# Altium PCB Gastroscopy-CutController.PcbDoc (part 1 of 3)
Units mm, origin at the board's own origin, x right, y up, seen from the top; angles counter-clockwise.
Board outline 69.5 x 69.5 mm, 4 copper layers (Top Layer, Layer 4 (GND), Layer 5 (PWR), Bottom Layer), stack 1.49 mm thick; 92 components, 63 nets, 304 pads, 96 vias.
Unrouted connection lines stored in the file: 142.
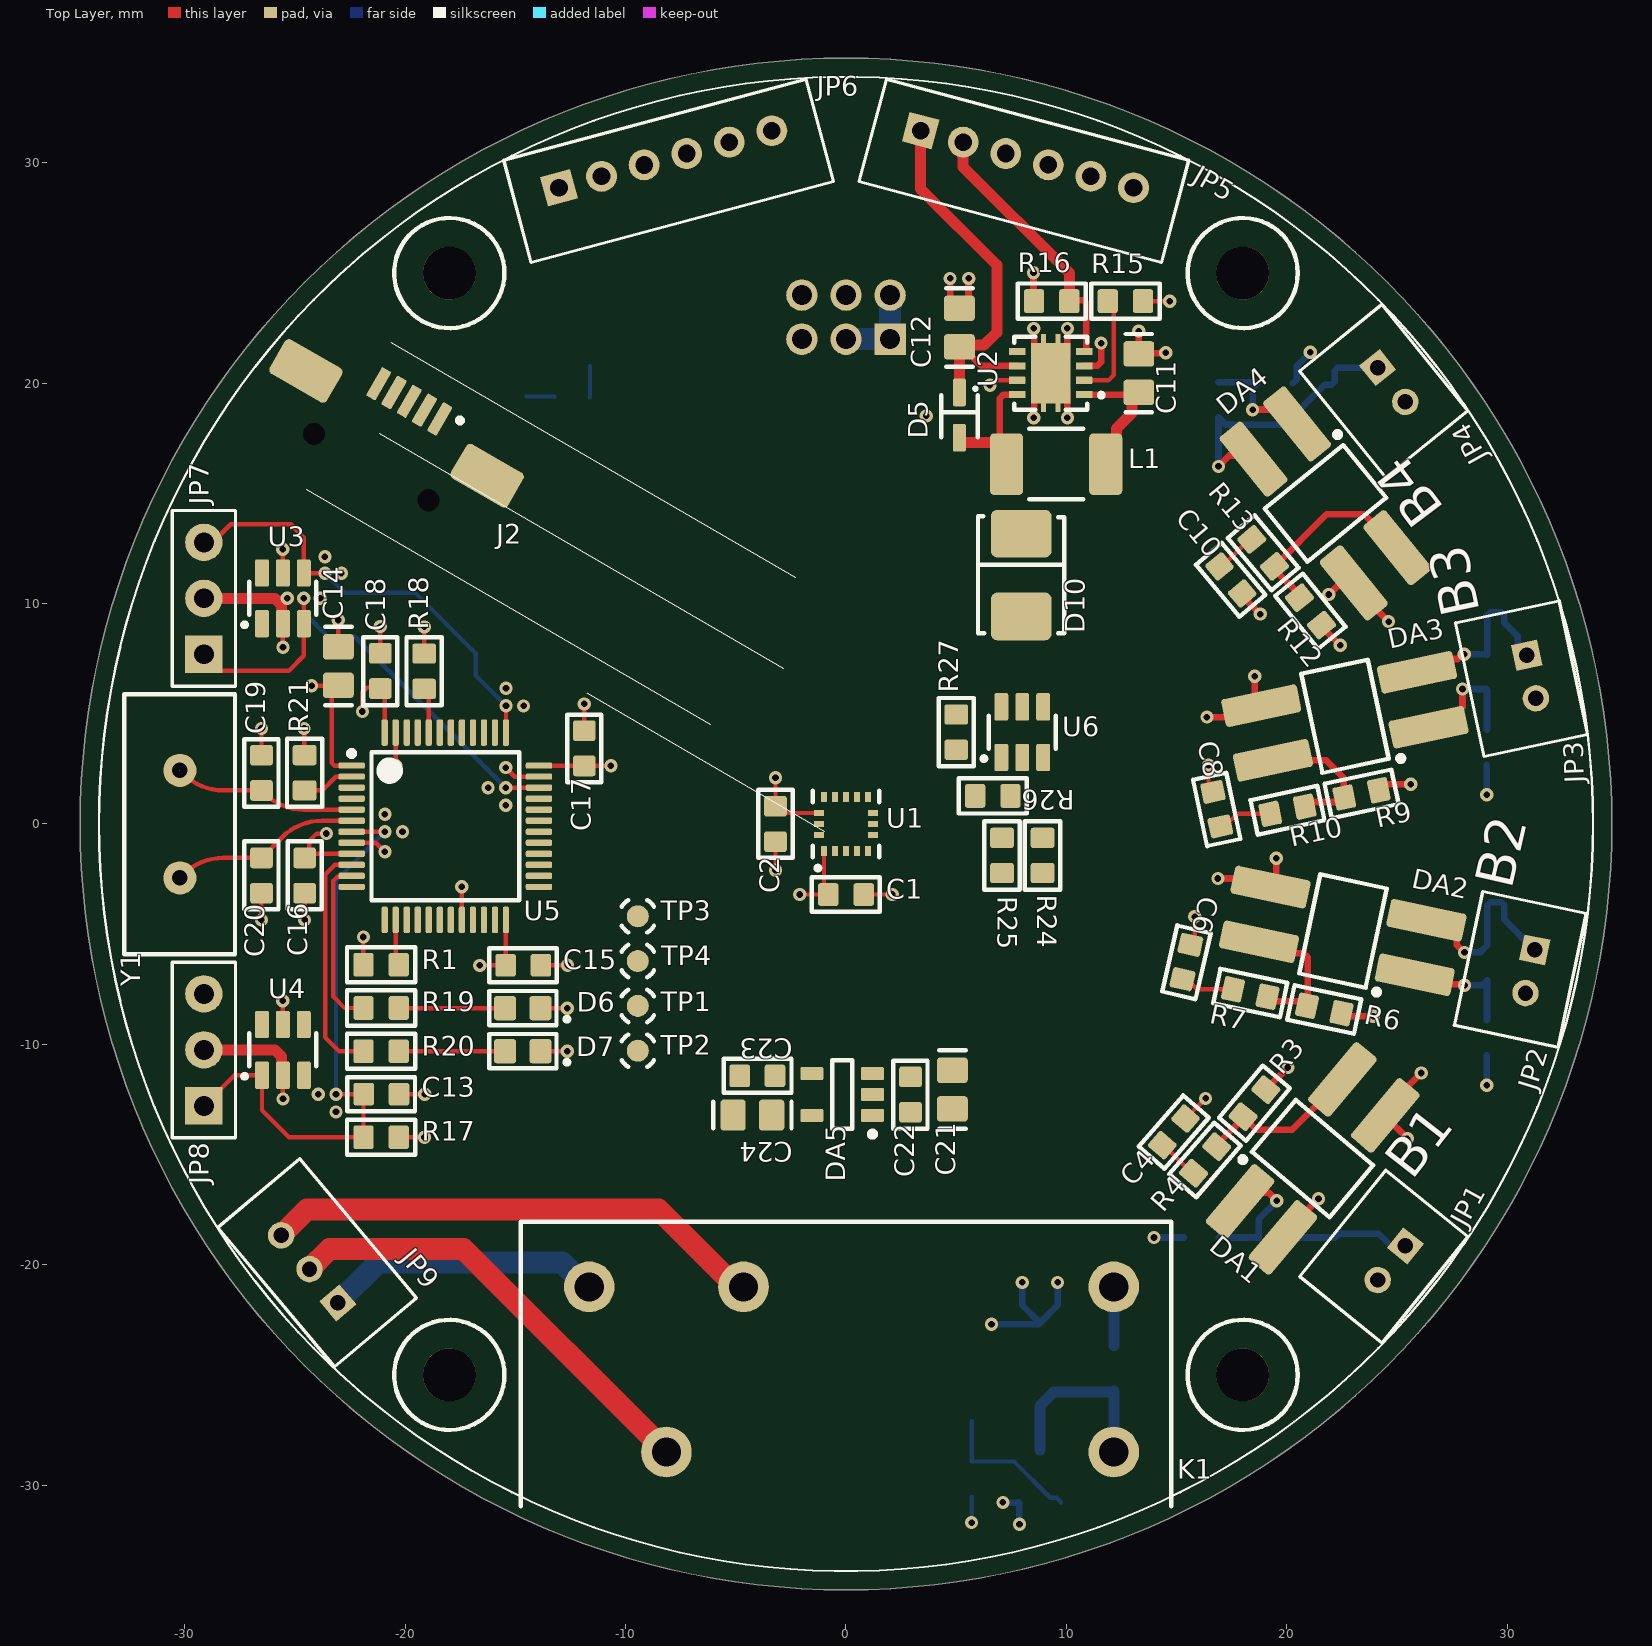
[diagram p0: Top Layer view]
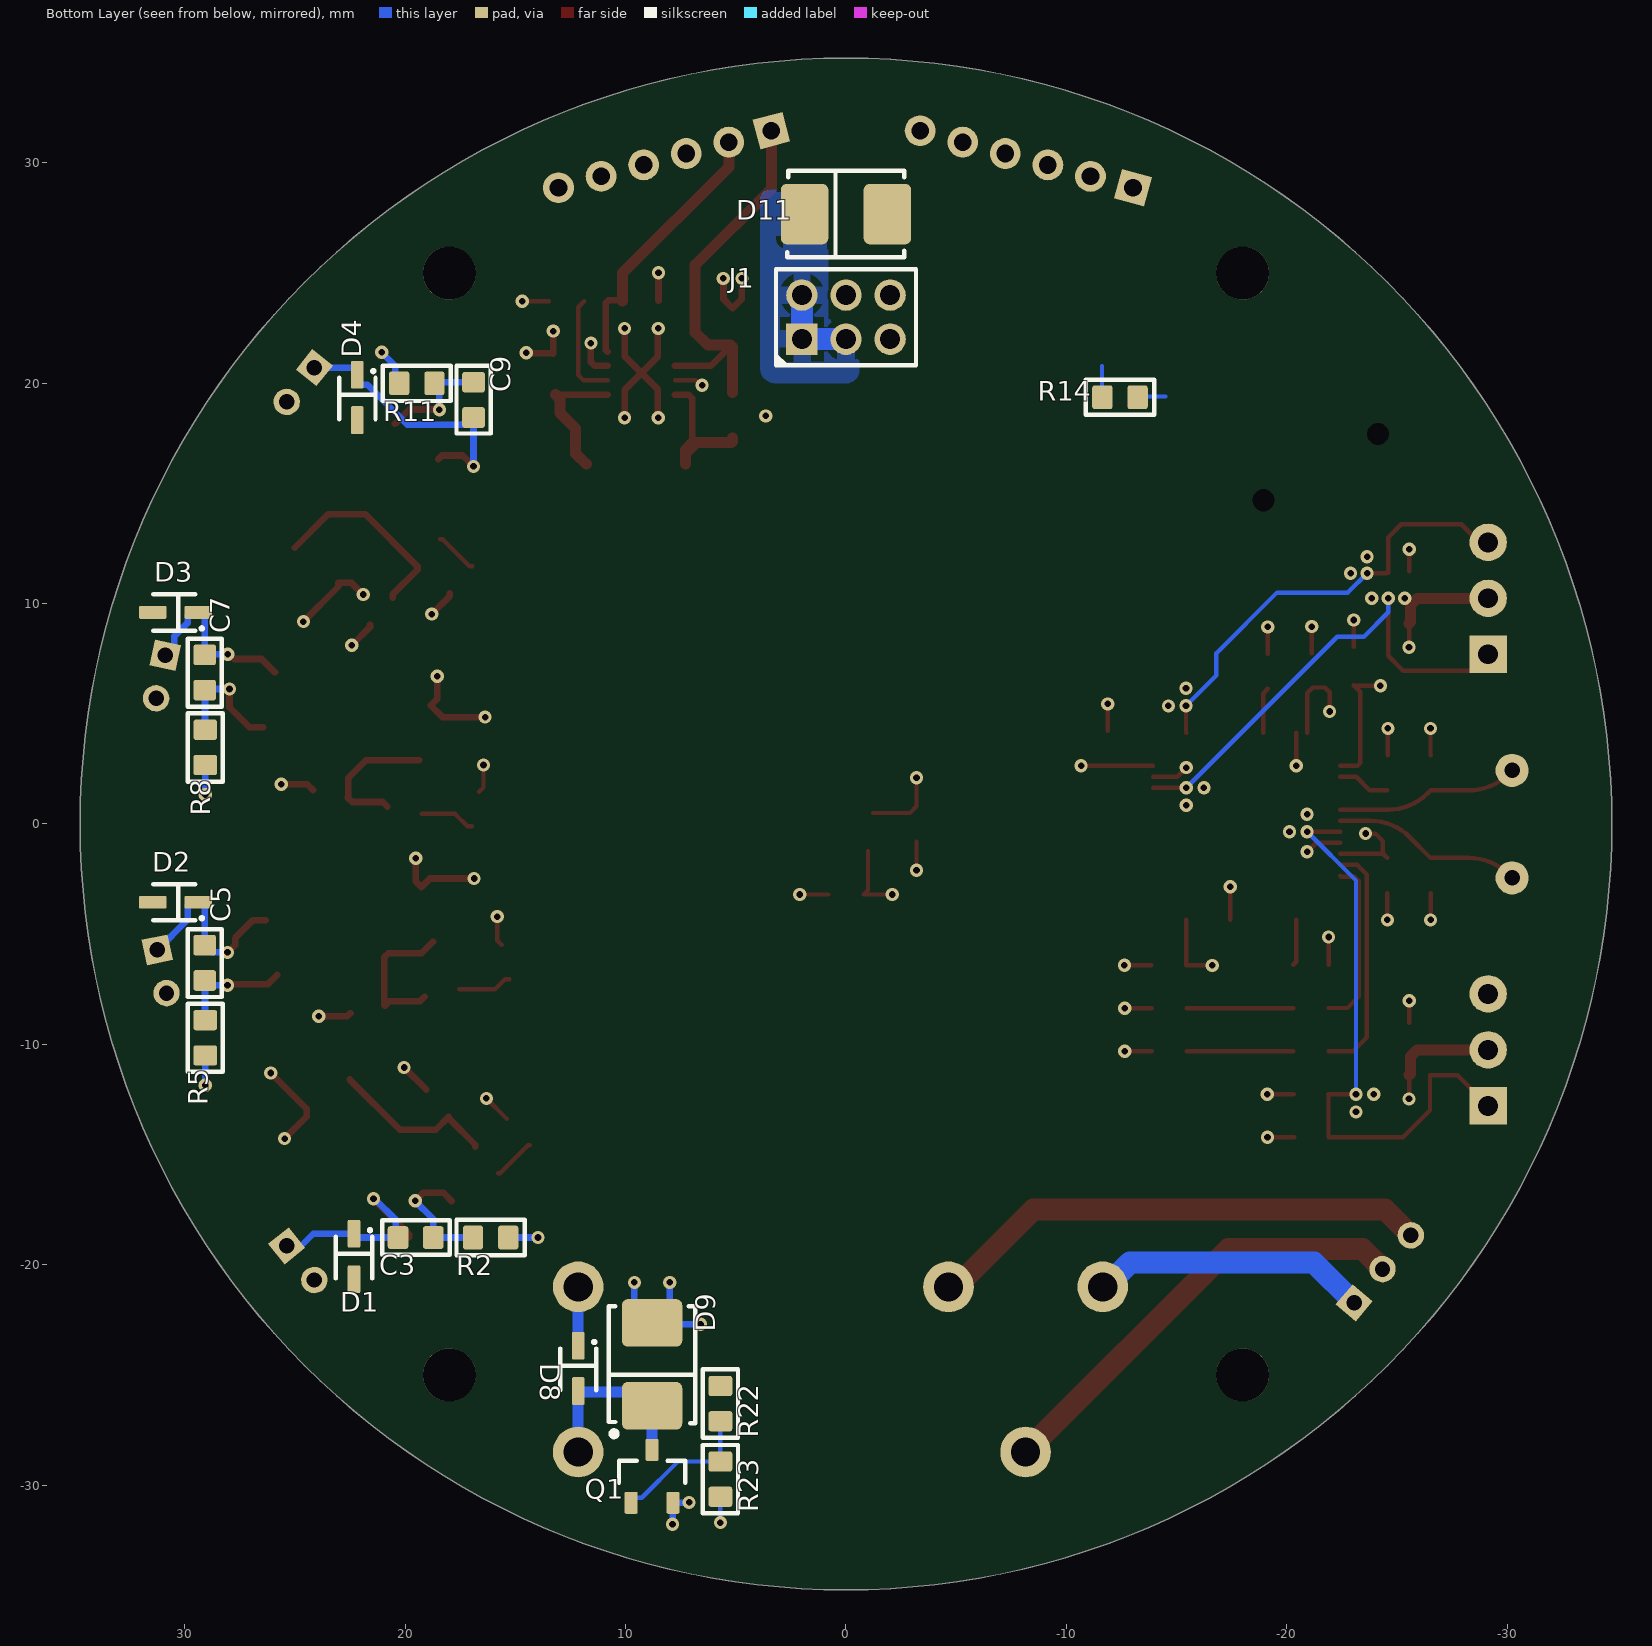
[diagram p1: Bottom Layer view, seen from below]

## Layer stack, top to bottom
Top Solder: solder mask 0.0127, Dk 4
Top Layer: signal copper 0.018
Prepreg 1: prepreg 0.127, Dk 4.2
Layer 4 (GND): signal copper 0.018
Core 2: core 1.164, Dk 4.2
Layer 5 (PWR): signal copper 0.018
Prepreg 4: prepreg 0.127, Dk 4.2
Bottom Layer: signal copper 0.018
Bottom Solder: solder mask 0.0127, Dk 4

## Board outline
0,-34.75 cw(c0,0) -34.75,0 cw(c0,0) 0,34.75 cw(c0,0) 34.75,0 cw(c0,0)

## Design rules (kind name [scope] priority, off if disabled: settings)
BoardOutlineClearance [All] p1: gap=0.508 ignorepadtopadclearanceinfootprint=FALSE
Clearance Clearance_CHASSIS [InNet('CHASSIS')] p1: gap=0.508 ignorepadtopadclearanceinfootprint=FALSE // ETH chassis to other
Clearance Clearance_TP [HasFootprint('TEST_POINT_TH')] p2: gap=0.508 ignorepadtopadclearanceinfootprint=FALSE // Test point for programming
Clearance Clearance_ETH_VDDA [InNamedPolygon('ETH_VDDA') vs InNamedPolygon('SOLID_3V3_LAYER5')] p3: gap=0.127 ignorepadtopadclearanceinfootprint=FALSE except(0.508: Fill-Fill Fill-Poly Fill-Region Poly-Poly Poly-Region Region-Region) // ETH_VDDA clearance to 3V3 polygon
Clearance Clearance_VCC_PLANE [InNamedPolygon('SOLID_3V3_LAYER5')] p4: gap=0.178 ignorepadtopadclearanceinfootprint=FALSE // Clearance between 3V3 VCC plane and vias
Clearance Clearance_Signal_Via [IsLinkedToPadViaTemplate('signal_via')] p5: gap=0.127 ignorepadtopadclearanceinfootprint=FALSE except(0.178: Via-Fill Via-Poly Via-Region) // 50 Ohm via, clearance to GND plane and to other polygons
Clearance Clearance_3W [OnLayer('Layer 3 (SIG)')] p6: gap=0.127 ignorepadtopadclearanceinfootprint=FALSE except(0.254: Arc-Arc Arc-Track Arc-SMDPad Arc-THPad Arc-Via Arc-Fill Arc-Poly Arc-Region Arc-Text Arc-Hole Track-Track Track-SMDPad Track-THPad Track-Via Track-Fill Track-Poly Track-Region Track-Text Track-Hole) // 3W rule for high-speed nets; applicable for 5mil tracks
Clearance [All] p7: gap=0.127 ignorepadtopadclearanceinfootprint=FALSE except(0.26: Arc-Hole Track-Hole SMDPad-Hole THPad-Hole Via-Hole Fill-Hole Poly-Hole Region-Hole Text-Hole) // Track-Track 7 mil for MCU
ComponentClearance ComponentClearance_TERMINALS [HasFootprint('DG128-5.0-03P-14') or HasFootprint('DG128-5.0-02P-14')] p1: gap=0 collisioncheckmode=3 verticalgap=0 showdistances=FALSE
ComponentClearance [All] p2: gap=0.508 collisioncheckmode=3 verticalgap=1.016 showdistances=FALSE donotcheckwithout3dbody=TRUE
DiffPairsRouting DiffPairsRouting_RS485 [InDifferentialPairClass('RS485_DIFFPAIR')] p1: maxlimit=0.305 minlimit=0.305 mostfreqgap=0.305 toplayer_minwidth=0.178 toplayer_maxwidth=0.178 toplayer_prefwidth=0.178 midlayer3_minwidth=0.178 midlayer3_maxwidth=0.178 midlayer3_prefwidth=0.178 midlayer4_minwidth=0.178 midlayer4_maxwidth=0.178 midlayer4_prefwidth=0.178 bottomlayer_minwidth=0.178 bottomlayer_maxwidth=0.178 bottomlayer_prefwidth=0.178 maxuncoupledlength=12.7 // 120 Ohm differential impedance
DiffPairsRouting DiffPairsRouting_USB [InDifferentialPairClass('USB_DIFFPAIR')] p2: maxlimit=0.127 minlimit=0.1 mostfreqgap=0.127 toplayer_mingap=0.127 toplayer_minwidth=0.19 toplayer_maxwidth=0.19 toplayer_prefwidth=0.19 bottomlayer_mingap=0.127 bottomlayer_minwidth=0.19 bottomlayer_maxwidth=0.19 bottomlayer_prefwidth=0.19 impedanceprofiledriven=TRUE impedanceprofileid={13F299FD-EDF9-4D52-ACC5-885CEE12CEAA} impedanceprofilevalue=90.000000 maxuncoupledlength=1.016 // 90 Ohm differential impedance
DiffPairsRouting DiffPairsRouting_MDI [InDifferentialPairClass('MDI_DIFFPAIR')] p3: maxlimit=0.127 minlimit=0.127 mostfreqgap=0.127 toplayer_minwidth=0.203 toplayer_maxwidth=0.203 toplayer_prefwidth=0.203 midlayer3_minwidth=0.203 midlayer3_maxwidth=0.203 midlayer3_prefwidth=0.203 midlayer4_minwidth=0.203 midlayer4_maxwidth=0.203 midlayer4_prefwidth=0.203 bottomlayer_minwidth=0.203 bottomlayer_maxwidth=0.203 bottomlayer_prefwidth=0.203 maxuncoupledlength=1.016 // 100 Ohm differential impedance
HoleSize [All] p1: absolutevalues=TRUE maxlimit=6.35 minlimit=0.254 maxpercent=80.000 minpercent=20.000
HoleToHoleClearance [All] p1: gap=0.381 allowstackedmicrovias=TRUE
MatchedLengths MatchLengths_xSignals_LCD [InxSignalClass('xSignals_LCD')] p1: tolerance=1.016 checknetsindiffpair=FALSE checkdiffpairvsdiffpair=TRUE checkxsignals=TRUE checkothers=TRUE usedelayunits=TRUE delaytolerance=100.000000 targetsourcename=LCD_CLK-LCD_CLK_MCU_PP1
MatchedLengths MatchLengths_xSignals_ETH [InxSignalClass('xSignals_ETH')] p2: tolerance=1.016 checknetsindiffpair=FALSE checkdiffpairvsdiffpair=TRUE checkxsignals=TRUE checkothers=TRUE usedelayunits=TRUE delaytolerance=100.000000 targetsourcename=ETH_CLK-ETH_RMII_CLK_PP1
MatchedLengths MatchLengths_xSignals_FMC [InxSignalClass('xSignals_FMC')] p3: tolerance=1.016 checknetsindiffpair=FALSE checkdiffpairvsdiffpair=TRUE checkxsignals=TRUE checkothers=TRUE usedelayunits=TRUE delaytolerance=100.000000 targetsourcename=FMC_CLK-FMC_CLK_MCU_PP1
MatchedLengths MatchLengths_xSignals_SDC [InxSignalClass('xSignals_SDC')] p4: tolerance=1.016 checknetsindiffpair=FALSE checkdiffpairvsdiffpair=TRUE checkxsignals=TRUE checkothers=TRUE usedelayunits=TRUE delaytolerance=100.000000 targetsourcename=SDMMC1_SDCARD_CK-SDMMC1_SDCARD_CK_MCU_PP1
MatchedLengths MatchedLengths_Diff_Grouped_MDI [InDifferentialPairClass('MDI_DIFFPAIR')] p5: tolerance=1.016 checknetsindiffpair=FALSE checkdiffpairvsdiffpair=TRUE checkxsignals=TRUE checkothers=TRUE
MatchedLengths MatchedLengths_Diff_Within_MDI [InDifferentialPairClass('MDI_DIFFPAIR')] p6: tolerance=1.016 checknetsindiffpair=TRUE checkdiffpairvsdiffpair=FALSE checkxsignals=FALSE checkothers=FALSE
MatchedLengths MatchedLengths_Diff_Within_RS485 [InDifferentialPairClass('RS485_DIFFPAIR')] p7: tolerance=2.54 checknetsindiffpair=TRUE checkdiffpairvsdiffpair=FALSE checkxsignals=FALSE checkothers=FALSE
MatchedLengths MatchedLengths_Diff_Within_USB [InDifferentialPairClass('USB_DIFFPAIR')] p8: tolerance=1.016 checknetsindiffpair=TRUE checkdiffpairvsdiffpair=FALSE checkxsignals=FALSE checkothers=FALSE
MinimumAnnularRing [All] p1: minimumring=0.127
MinimumSolderMaskSliver [All] p1: minsoldermaskwidth=0.05
PlaneConnect [All] p1: planeconnectstyle=Direct reliefexpansion=0.508 reliefentries=4 reliefconductorwidth=0.254 reliefairgap=0.254
PolygonConnect PolygonConnect_SMB_TVS [HasFootprint('SMB') or HasFootprint('SMB-BIDIR')] p1: connectstyle=Relief reliefconductorwidth=2 reliefentries=4 polygonreliefangle="90 Angle" airgapwidth=0.2 // POWER IN fuse
PolygonConnect PolygonConnect_POWER_SWITCH [HasFootprint('48BFSP1M2QT')] p2: connectstyle=Relief reliefconductorwidth=1.016 reliefentries=4 polygonreliefangle="90 Angle" airgapwidth=0.127 // POWER switch
PolygonConnect PolygonConnect_POWER_FILTER [HasFootprint('BNX022-01L')] p3: connectstyle=Relief reliefconductorwidth=2.032 reliefentries=4 polygonreliefangle="90 Angle" airgapwidth=0.127 // POWER filter FL1
PolygonConnect PolygonConnect_POWER_IN_MOSFET [InComponent('Q1')] p4: connectstyle=Relief reliefconductorwidth=0.381 reliefentries=4 polygonreliefangle="90 Angle" airgapwidth=0.127 // Q1 reverse polarity protection MOSFET
PolygonConnect PolygonConnect_MOSFET_ZENER [InComponent('D2')] p5: connectstyle=Relief reliefconductorwidth=0.508 reliefentries=4 polygonreliefangle="90 Angle" airgapwidth=0.127 // Q1 MOSFET gate voltage stabilizer
PolygonConnect PolygonConnect_DCDC_IC [HasFootprint('SOIC-8EP_150MIL') vs InNet('GND')] p6: connectstyle=Relief reliefconductorwidth=2.032 reliefentries=4 polygonreliefangle="90 Angle" airgapwidth=0.127 // DC/DC IC connection
PolygonConnect PolygonConnect_DCDC_CAPS [(WithinRoom('DC/DC Step-Down Converter 12V') Or WithinRoom('DC/DC Step-Down Converter 3.3V')) And HasFootprint('CAP_1210')] p7: connectstyle=Relief reliefconductorwidth=1.27 reliefentries=4 polygonreliefangle="90 Angle" airgapwidth=0.127 // DC/DC input and output capacitors
PolygonConnect PolygonConnect_ETH_BULKCAP [WithinRoom('10/100 Mbps Ethernet PHY') And HasFootprint('CAP_1210')] p8: connectstyle=Relief reliefconductorwidth=1.27 reliefentries=4 polygonreliefangle="90 Angle" airgapwidth=0.127 // 1210 bulck capacitor in ETH power supply
PolygonConnect PolygonConnect_DCDC_IND [(InNet('12V') Or InNet('3V3')) And HasFootprint('SRU1048')] p9: connectstyle=Relief reliefconductorwidth=1.778 reliefentries=4 polygonreliefangle="90 Angle" airgapwidth=0.127 // DC/DC inductors terminal in specific nets
PolygonConnect PolygonConnect_DCDC_5V_IC [HasFootprint('SOT-23-6') vs (InNet('GND') Or InNet('12V')) And WithinRoom('USB 2.0 Full-Speed')] p10: connectstyle=Relief reliefconductorwidth=0.584 reliefentries=4 polygonreliefangle="90 Angle" airgapwidth=0.127 // DC/DC 5V IC connection
PolygonConnect PolygonConnect_DCDC_5V_CAPS [HasFootprint('CAP_1210') vs InNet('5V')] p11: connectstyle=Direct reliefconductorwidth=1.27 reliefentries=4 polygonreliefangle="90 Angle" airgapwidth=0.3 // Caps connection to GND and VCC polygons
PolygonConnect PolygonConnect_DCDC_5V_OUT_CAP [InNet('5V') And HasFootprint('CAP_0603')] p12: connectstyle=Relief reliefconductorwidth=0.813 reliefentries=4 polygonreliefangle="90 Angle" airgapwidth=0.127 // Output cap connection to VCC polygon
PolygonConnect PolygonConnect_DCDC_5V_IND [HasFootprint('SDR1006')] p13: connectstyle=Direct reliefconductorwidth=0.8 reliefentries=4 polygonreliefangle="90 Angle" airgapwidth=0.3 // DC/DC 5V inductor terminal in specific nets
PolygonConnect PolygonConnect_DCDC_HOTSWITCH [InNet('NetC4_2')] p14: connectstyle=Relief reliefconductorwidth=0.8 reliefentries=4 polygonreliefangle="90 Angle" airgapwidth=0.3 // DC/DC 5V inductor terminal in specific nets
PolygonConnect PolygonConnect_DCDC_BL_IC [WithinRoom('LCD & Capacitive Touchscreen Module') And HasFootprint('SOT-23-6')] p15: connectstyle=Relief reliefconductorwidth=0.584 reliefentries=4 polygonreliefangle="90 Angle" airgapwidth=0.127 // DC/DC Backlight IC
PolygonConnect PolygonConnect_DCDC_BL_CAPS [WithinRoom('LCD & Capacitive Touchscreen Module') And HasFootprint('CAP_0805')] p16: connectstyle=Relief reliefconductorwidth=1.016 reliefentries=4 polygonreliefangle="90 Angle" airgapwidth=0.127 // DC/DC Backlight capacitors
PolygonConnect PolygonConnect_DCDC_BL_IND [WithinRoom('LCD & Capacitive Touchscreen Module') And HasFootprint('LQH3NPN470MMEL')] p17: connectstyle=Relief reliefconductorwidth=0.965 reliefentries=4 polygonreliefangle="90 Angle" airgapwidth=0.127 // DC/DC Backlight inductor
PolygonConnect PolygonConnect_WIFI_GND [InNet('GND') And HasFootprint('ATWINC3400-MR210CA142')] p18: connectstyle=Relief reliefconductorwidth=0.762 reliefentries=4 polygonreliefangle="90 Angle" airgapwidth=0.127 // WiFi module to GND poly
PolygonConnect PolygonConnect_USB_CONN_GND [InNet('GND') vs HasFootprint('USB3106-30-0230-A')] p19: connectstyle=Relief reliefconductorwidth=0.508 reliefentries=4 polygonreliefangle="90 Angle" airgapwidth=0.203 // USB connector GND
PolygonConnect PolygonConnect_FB [HasFootprint('FB_1206')] p20: connectstyle=Relief reliefconductorwidth=1.143 reliefentries=4 polygonreliefangle="90 Angle" airgapwidth=0.127 // Ferrite Bead to poly
PolygonConnect PolygonConnect_FUSE [HasFootprint('PTC_1812')] p21: connectstyle=Relief reliefconductorwidth=1.778 reliefentries=4 polygonreliefangle="90 Angle" airgapwidth=0.127 // Fuse to poly
PolygonConnect PolygonConnect_12V_OUT_SMA [(WithinRoom('RS-485 Interface') Or WithinRoom('Wiegand Interface')) And HasFootprint('SMA')] p22: connectstyle=Relief reliefconductorwidth=1.524 reliefentries=4 polygonreliefangle="90 Angle" airgapwidth=0.127 // TVS diodes in SMA package, 12V output polygons
PolygonConnect PolygonConnect_TP_GND [InNet('GND') vs HasFootprint('TEST_POINT_TH') Or HasFootprint('TEST_POINT_SMT')] p23: connectstyle=Relief reliefconductorwidth=0.508 reliefentries=4 polygonreliefangle="90 Angle" airgapwidth=0.508 // Test points to GND
PolygonConnect PolygonConnect_ETH_CHASSIS [InNet('CHASSIS')] p24: connectstyle=Relief reliefconductorwidth=1.016 reliefentries=4 polygonreliefangle="90 Angle" airgapwidth=0.381 // ETH Chassis
PolygonConnect PolygonConnect_VIA [IsVia] p25: connectstyle=Direct reliefconductorwidth=0.8 reliefentries=4 polygonreliefangle="90 Angle" airgapwidth=0.3
PolygonConnect [All] p26: connectstyle=Relief reliefconductorwidth=0.8 reliefentries=4 polygonreliefangle="90 Angle" airgapwidth=0.3
ReturnPath [OnLayer('Layer 3 (SIG)')] p1: _gaplimit=0.127
RoutingVias [All] p1: holewidth=0.254 width=0.66 viastyle="Through Hole" minholewidth=0.254 minwidth=0.66 maxholewidth=1.016 maxwidth=1.422 useviatemplates=TRUE viatemplateguid#1={79E6DCE3-D317-4519-9061-2CDD01818D80} viatemplateguid#2={DB4F5FA1-A2BD-4F5F-94AF-CFE80AD55038} viatemplatename#1=power_via viatemplatename#2=signal_via
SilkToSilkClearance [All] p1: silktosilkclearance=0.051
SilkToSolderMaskClearance [All] p1: minsilkscreentomaskgap=0.051 clearancetoexposedcopper=FALSE
SolderMaskExpansion SolderMaskExpansion_LQFP176 [HasFootprint('LQFP176')] p1: expansion=0.102 istentingtop=FALSE
SolderMaskExpansion SolderMaskExpansion_TSSOP-14 [HasFootprint('TSSOP-14')] p2: expansion=0.102 istentingtop=FALSE
SolderMaskExpansion SolderMaskExpansion_TSOP-54 [HasFootprint('TSOP-54-II')] p3: expansion=0.127 istentingtop=FALSE
SolderMaskExpansion SolderMaskExpansion_SDCard [HasFootprint('475710001')] p4: expansion=0.102 istentingtop=FALSE
SolderMaskExpansion SolderMaskExpansion_LCD_conns [HasFootprint('62684-402100AHLF') Or HasFootprint('0527460671')] p5: expansion=0.102 istentingtop=FALSE
SolderMaskExpansion SolderMaskExpansion_Via [IsVia] p6: expansion=0.152 istentingtop=TRUE
SolderMaskExpansion [All] p7: expansion=0.076 istentingtop=FALSE
UnRoutedNet [All] p1: checkbadconnections=TRUE
Width Width_Signal_Buried [OnLayer('Layer 3 (SIG)') And  Not InNet('5V')] p1: maxlimit=0.127 minlimit=0.127 preferedwidth=0.127 // 50 Ohm track on buried layers
Width [All] p2: maxlimit=2.54 minlimit=0.127 preferedwidth=0.3 // 50 Ohm track on top and bottom layers
21 further rules are at their usual default settings.

## Classes and differential pairs
channel class Gastroscopy-CutController_Button: Buttons1 Buttons2 Buttons3 Buttons4
component class Accelerometer: C1 C2 R1 U1
component class Buttons4: C9 C10 D4 DA4 JP4 R11 R12 R13
component class Buttons3: C7 C8 D3 DA3 JP3 R8 R9 R10
component class Buttons2: C5 C6 D2 DA2 JP2 R5 R6 R7
component class Buttons1: C3 C4 D1 DA1 JP1 R2 R3 R4
differential pair class USB_DIFFPAIR: D MCU_USB_D USB
net class MCU_IN[1..4]: MCU_IN1 MCU_IN2 MCU_IN3 MCU_IN4
component class "LED Driver": C11 C12 D5 JP5 JP6 L1 R14 R15 R16 U2
component class Relay: D8 D9 JP9 K1 Q1 R22 R23
component class USB: C21 C22 C23 C24 D10 D11 DA5 J1 J2 R24 R25 R26 R27 U6
component class MCU: C13 C14 C15 C16 C17 C18 C19 C20 D6 D7 JP7 JP8 R17 R18 R19 R20 R21 TP1 TP2 TP3 TP4 U3 U4 U5 Y1
differential pair USB: +USB_P -USB_N
differential pair MCU_USB_D: +MCU_USB_D_P -MCU_USB_D_N
differential pair D: +D_P -D_N

## Components (designator, comment, footprint, x,y, rotation, side; value= is the part's Value field where it differs from the comment)
C1 "100nF" CAP_0603 0,-3.2 r0 top
C2 "100nF" CAP_0603 -3.2,0 r270 top
C3 "100nF" CAP_0603 19.525,-18.764 r0 bottom
C4 "100nF" CAP_0603 14.877,-13.97 r49 top
C5 "100nF" CAP_0603 29.1,-6.3 r90 bottom (schematic designator C3)
C6 "100nF" CAP_0603 15.449,-6.263 r77 top (schematic designator C4)
C7 "100nF" CAP_0603 29.1,6.875 r90 bottom (schematic designator C3)
C8 "100nF" CAP_0603 16.819,0.676 r102 top (schematic designator C4)
C9 "100nF" CAP_0603 16.9,19.246 r270 bottom (schematic designator C3)
C10 "100nF" CAP_0603 17.461,11.075 r310 top (schematic designator C4)
C11 "10uF" CAP_0805 13.285,20.46 r270 top (schematic designator C6)
C12 "10uF" CAP_0805 5.145,22.527 r270 top (schematic designator C5)
C13 "100nF" CAP_0603 -21.082,-12.258 r0 top (schematic designator C8)
C14 "10uF" CAP_0805 -23.035,7.169 r270 top (schematic designator C10)
C15 "100nF" CAP_0603 -14.645,-6.409 r0 top (schematic designator C12)
C16 "100nF" CAP_0603 -24.565,-2.338 r270 top (schematic designator C11)
C17 "100nF" CAP_0603 -11.874,3.436 r90 top (schematic designator C13)
C18 "100nF" CAP_0603 -21.132,6.944 r90 top (schematic designator C14)
C19 "30pF" CAP_0603 -26.525,2.324 r90 top (schematic designator C7)
C20 "30pF" CAP_0603 -26.525,-2.338 r270 top (schematic designator C9)
C21 "10uF" CAP_0805 4.825,-12.05 r270 top (schematic designator C15)
C22 "100nF" CAP_0603 2.925,-12.275 r90 top (schematic designator C16)
C23 "100nF" CAP_0603 -4.025,-11.426 r180 top (schematic designator C17)
C24 "10uF" CAP_0805 -4.25,-13.207 r0 top (schematic designator C18)
D1 "PESD5V0L1BA115" SOD-323 22.325,-19.625 r270 bottom
D2 "PESD5V0L1BA115" SOD-323 30.425,-3.55 r0 bottom (schematic designator D1)
D3 "PESD5V0L1BA115" SOD-323 30.425,9.6 r0 bottom (schematic designator D1)
D4 "PESD5V0L1BA115" SOD-323 22.175,19.357 r270 bottom (schematic designator D1)
D5 "PMEG4010BEA,115" SOD-323 5.145,18.555 r270 top (schematic designator D2)
D6 "LTST-C193TBKT-5A" L_0603_BLUE -14.665,-8.357 r0 top (schematic designator D3)
D7 "LTST-C191KGKT" L_0603_GREEN -14.665,-10.31 r0 top (schematic designator D4)
D8 "PMEG4010BEA,115" SOD-323 12.15,-24.7 r270 bottom (schematic designator D5)
D9 "SMBJ24A" SMB 8.8,-24.518 r90 bottom (schematic designator D6)
D10 "SMBJ5.0CA" SMB-BIDIR 7.951,11.297 r270 top (schematic designator D8)
D11 "SMBJ5.0CA" SMB-BIDIR 0,27.675 r180 bottom (schematic designator D7)
DA1 "HCPL-817-50CE" HCPL-817-50CE 21.184,-15.164 r50 top
DA2 "HCPL-817-50CE" HCPL-817-50CE 22.525,-4.85 r168 top (schematic designator DA1)
DA3 "HCPL-817-50CE" HCPL-817-50CE 22.626,4.882 r192 top (schematic designator DA1)
DA4 "HCPL-817-50CE" HCPL-817-50CE 21.763,14.537 r309 top (schematic designator DA1)
DA5 "TLV75533PDBVR" SOT-23-5 -0.175,-12.275 r180 top (schematic designator DA2)
J1 "DS1026-06-2*3S8BV" DS1026-06-2*3S8BV 0,23 r90 bottom locked
J2 "MUSB-B5-S-VT-TSMT-1" MUSB-B5-S-VT-TSMT-1 -20.787,17.5 r330 top
JP1 "DS1066-2MVW6X" DS1066-2MVW6X 24.404,-19.632 r321 top locked
JP2 "DS1066-2MVW6X" DS1066-2MVW6X 30.6,-6.6 r348 top locked (schematic designator JP1)
JP3 "DS1066-2MVW6X" DS1066-2MVW6X 30.656,6.589 r12 top locked (schematic designator JP1)
JP4 "DS1066-2MVW6X" DS1066-2MVW6X 24.402,19.647 r39 top locked (schematic designator JP1)
JP5 "DS1066-6MVW6X" DS1066-6MVW6X 8.099,29.73 r75 top (schematic designator JP2)
JP6 "DS1066-6MVW6X" DS1066-6MVW6X -8.078,29.729 r105 top (schematic designator JP3)
JP7 "61300311121" 61300311121 -29.138,10.24 r180 top (schematic designator JP4)
JP8 "61300311121" 61300311121 -29.138,-10.249 r180 top (schematic designator JP5)
JP9 "DS1066-3MVW6X" DS1066-3MVW6X -24,-19.907 r220 top (schematic designator JP6)
K1 "3-1393239-6" 3-1393239-6 0.025,-24.65 r180 top locked
L1 "4.7uH" NLC453232T-4R7K-PF 9.535,16.327 r180 top
Q1 "SI2304DDS-T1-GE3" SOT-23-3 8.8,-29.6 r90 bottom
R1 "10kR" RES_0603 -21.094,-6.384 r180 top
R2 "360R" RES_0603 16.125,-18.764 r0 bottom (schematic designator R3)
R3 "1kR" RES_0603 18.534,-12.666 r230 top (schematic designator R2)
R4 "100R" RES_0603 16.297,-15.241 r49 top
R5 "360R" RES_0603 29.075,-9.7 r90 bottom (schematic designator R3)
R6 "1kR" RES_0603 21.703,-8.415 r168 top (schematic designator R2)
R7 "100R" RES_0603 18.341,-7.67 r348 top (schematic designator R4)
R8 "360R" RES_0603 29.075,3.475 r90 bottom (schematic designator R3)
R9 "1kR" RES_0603 23.396,1.369 r192 top (schematic designator R2)
R10 "100R" RES_0603 20.033,0.624 r12 top (schematic designator R4)
R11 "360R" RES_0603 19.475,19.996 r180 bottom (schematic designator R3)
R12 "1kR" RES_0603 21.075,9.65 r129 top (schematic designator R2)
R13 "100R" RES_0603 18.927,12.3 r310 top (schematic designator R4)
R14 "10kR" RES_0603 -12.433,19.367 r180 bottom (schematic designator R5)
R15 "62kR" RES_0603 12.677,23.727 r0 top (schematic designator R6)
R16 "10R" RES_0603 9.335,23.727 r180 top (schematic designator R7)
R17 "10kR" RES_0603 -21.094,-14.213 r180 top (schematic designator R10)
R18 "10kR" RES_0603 -19.141,6.932 r270 top (schematic designator R12)
R19 "100R" RES_0603 -21.094,-8.347 r0 top (schematic designator R8)
R20 "360R" RES_0603 -21.094,-10.31 r0 top (schematic designator R9)
R21 "10kR" RES_0603 -24.565,2.324 r270 top (schematic designator R11)
R22 "100R" RES_0603 5.7,-26.3 r270 bottom (schematic designator R13)
R23 "10kR" RES_0603 5.7,-29.726 r270 bottom (schematic designator R14)
R24 "24R" RES_0603 8.92,-1.427 r90 top (schematic designator R16)
R25 "24R" RES_0603 7.08,-1.428 r90 top (schematic designator R17)
R26 "1.5kR" RES_0603 6.66,1.275 r0 top (schematic designator R15)
R27 "100kR" RES_0603 5,4.167 r270 top (schematic designator R18)
TP1 "TEST_POINT_SMT" TEST_POINT_SMT -9.446,-8.254 r0 top (schematic designator TP4)
TP2 "TEST_POINT_SMT" TEST_POINT_SMT -9.446,-10.287 r90 top (schematic designator TP1)
TP3 "TEST_POINT_SMT" TEST_POINT_SMT -9.446,-4.187 r90 top (schematic designator TP2)
TP4 "TEST_POINT_SMT" TEST_POINT_SMT -9.446,-6.22 r180 top (schematic designator TP3)
U1 "LIS3DHTR" LIS3DHTR 0,0 r90 top
U2 "STLD40DPUR" STLD40DPUR 9.285,20.46 r180 top
U3 "SRV05-4ATR" SOT-23-6 -25.55,10.24 r90 top (schematic designator U4)
U4 "SRV05-4ATR" SOT-23-6 -25.55,-10.249 r90 top (schematic designator U5)
U5 "STM32F103CBT6" LQFP48 -18.182,-0.101 r0 top (schematic designator U3)
U6 "USBLC6-2SC6" SOT-23-6 7.997,4.167 r90 top
Y1 "8MHz" HC-49/US -30.225,-0.006 r90 top

## Footprints (in the part's own frame and the unit in brackets; to place one, negate y for a bottom-side part, rotate by r counter-clockwise, add the part's x,y. Pads: shape width x height; smd on the part's side, far side on the other; paste and mask are expansions set on the pad)
3-1393239-6 [mm]
  round 2.3 hole 1.32 mask+0.1: 11(8.175,3.85) 12(4.675,-3.65) 14(11.675,-3.65) A1(-12.125,-3.65) A2(-12.125,3.85)
  silkscreen extent -14.74,-6.6 14.78,6.3, body extent -14.5,-6.35 14.5,6.35, height 15.7
61300311121 [mm] "CONN HEADER VERT 3POS 2.54MM"
  rect 1.7x1.7 hole 0.9: 1(0,2.54)
  round 1.7 hole 0.9: 2(0,0) 3(0,-2.54)
  silkscreen extent -1.44,-3.98 1.44,3.98, body extent -1.26,-3.81 1.28,3.81, height 8.54
CAP_0603 [mm] "Generic 0603 capacitor, IPC"
  rrect25% 0.94x1.03 smd: 1(-0.8,0) 2(0.8,0)
  silkscreen extent -1.55,-0.77 1.53,0.77, body extent -0.8,-0.4 0.8,0.4, height 0.9
CAP_0805 [mm] "Generic 0805 capacitor, IPC"
  rrect25% 1.15x1.4 smd: 1(-0.875,0) 2(0.875,0)
  silkscreen extent -1.78,-0.6 1.77,0.6, body extent -1.1,-0.68 1.1,0.68, height 1.46
DS1026-06-2*3S8BV [mm]
  rect 1.428x1.428 hole 0.9: 1(-1,2)
  round 1.428 hole 0.9: 2(1,2) 3(-1,0) 4(1,0) 5(-1,-2) 6(1,-2)
  silkscreen extent -2.18,-3.18 2.17,3.18, body extent -2,-3 2,3, height 4.5
DS1066-2MVW6X [mm]
  rect 1.2x1.2 hole 0.7: 1(0.45,1)
  round 1.2 hole 0.7: 2(0.45,-1)
  silkscreen extent -2.4,-3.1 2.4,3.1, body extent -2.25,-2.95 2.25,2.95, height 6
DS1066-3MVW6X [mm]
  rect 1.2x1.2 hole 0.7: 1(0.45,2)
  round 1.2 hole 0.7: 2(0.45,0) 3(0.45,-2)
  silkscreen extent -2.43,-4.12 2.43,4.12, body extent -2.25,-3.95 2.25,3.95, height 6
DS1066-6MVW6X [mm]
  rect 1.4x1.4 hole 0.8: 1(0.45,5)
  round 1.4 hole 0.8: 2(0.45,3) 3(0.45,1) 4(0.45,-1) 5(0.45,-3) 6(0.45,-5)
  silkscreen extent -2.5,-7.1 2.3,7.1, body extent -2.35,-6.95 2.15,6.95, height 6
HC-49/US [mm]
  round 1.5 hole 0.7: 1(-2.44,0) 2(2.44,0)
  silkscreen extent -5.9,-2.5 5.9,2.52, body extent -5.67,-2.32 5.68,2.33, height 3.6
HCPL-817-50CE [mm] "SOP, 4-Leads, Body 4,58x6,50mm, Pitch 2,54mm, IPC Medium Density"
  rrect25% 3.5x1.3 smd: 1(-3.625,1.27) 2(-3.625,-1.27) 3(3.6,-1.27) 4(3.6,1.27)
  silkscreen extent -2.22,-2.3 1.52,2.52, body extent -4.91,-2.32 4.97,2.26, height 3.75
L_0603_BLUE [mm]
  rrect25% 1x1.1 smd: 1(-0.8,0) 2(0.8,0)
  silkscreen extent -1.53,-0.78 2.1,0.78, body extent -0.85,-0.45 0.85,0.45, height 0.9
L_0603_GREEN [mm]
  rrect25% 1x1.1 smd: 1(-0.8,0) 2(0.8,0)
  silkscreen extent -1.53,-0.78 2.1,0.78, body extent -0.85,-0.45 0.85,0.45, height 0.9
LIS3DHTR [mm]
  rect 0.45x0.29 smd paste-1 mask+0.05: 1(-1.225,1) 2(-1.225,0.5) 3(-1.225,0) 4(-1.225,-0.5) 5(-1.225,-1) 9(1.225,-1) 10(1.225,-0.5) 11(1.225,0) 12(1.225,0.5) 13(1.225,1)
  rect 0.29x0.45 smd paste-1 mask+0.05: 6(-0.5,-1.225) 7(0,-1.225) 8(0.5,-1.225) 14(0.5,1.225) 15(0,1.225) 16(-0.5,1.225)
  silkscreen extent -2.1,-1.5 1.5,1.5, body extent -1.5,-1.5 1.5,1.5, height 1.02
LQFP48 [mm] "Thin QFP, 48-Leads, Body 7x7mm, Pitch 0.5mm, IPC Medium Density"
  rrect50% 1.2x0.28 smd mask+0.05: 1(-4.25,2.75) 2(-4.25,2.25) 3(-4.25,1.75) 4(-4.25,1.25) 5(-4.25,0.75) 6(-4.25,0.25) 7(-4.25,-0.25) 8(-4.25,-0.75) 9(-4.25,-1.25) 10(-4.25,-1.75) 11(-4.25,-2.25) 12(-4.25,-2.75) 25(4.25,-2.75) 26(4.25,-2.25) 27(4.25,-1.75) 28(4.25,-1.25) 29(4.25,-0.75) 30(4.25,-0.25) 31(4.25,0.25) 32(4.25,0.75) 33(4.25,1.25) 34(4.25,1.75) 35(4.25,2.25) 36(4.25,2.75)
  rrect50% 0.28x1.2 smd mask+0.05: 13(-2.75,-4.25) 14(-2.25,-4.25) 15(-1.75,-4.25) 16(-1.25,-4.25) 17(-0.75,-4.25) 18(-0.25,-4.25) 19(0.25,-4.25) 20(0.75,-4.25) 21(1.25,-4.25) 22(1.75,-4.25) 23(2.25,-4.25) 24(2.75,-4.25) 37(2.75,4.25) 38(2.25,4.25) 39(1.75,4.25) 40(1.25,4.25) 41(0.75,4.25) 42(0.25,4.25) 43(-0.25,4.25) 44(-0.75,4.25) 45(-1.25,4.25) 46(-1.75,4.25) 47(-2.25,4.25) 48(-2.75,4.25)
  silkscreen extent -4.37,-3.36 3.35,3.42, body extent -4.51,-4.51 4.51,4.51, height 1.46
MUSB-B5-S-VT-TSMT-1 [mm]
  rrect25% 0.5x1.5 smd: 1(1.6,1.937) 2(0.8,1.937) 3(0,1.937) 4(-0.8,1.937) 5(-1.6,1.937)
  rrect25% 3x1.8 smd: 6(-4.75,0.787) 6(4.75,0.788)
  round 0.9 hole 1 unplated: ""(-3,-1.513) ""(3,-1.513)
  silkscreen extent 2.33,2.24 2.53,2.44, body extent -5.9,-2.26 5.8,2.34, height 6.5
NLC453232T-4R7K-PF [mm]
  rrect25% 1.5x2.8 smd: 1(-2.25,0) 2(2.25,0)
  silkscreen extent -1.22,-1.6 1.22,1.6, body extent -2.25,-1.6 2.25,1.6, height 3.4
RES_0603 [mm] "Generic 0603 resistor, IPC"
  rrect25% 0.92x1.08 smd: 1(-0.8,0) 2(0.8,0)
  silkscreen extent -1.55,-0.8 1.55,0.8, body extent -0.8,-0.4 0.8,0.4, height 0.5
SMB [mm] "Molded Diode, 2-Leads, Body 4.6x2.9mm, IPC"
  rrect25% 2.159x2.743 smd: 1(-1.88,0) 2(1.88,0)
  silkscreen extent -3.27,-1.96 2.64,1.96, body extent -2.65,-1.85 2.65,1.85, height 2.24
SMB-BIDIR [mil] "Molded Diode, 2-Leads, Body 4.6x2.9mm, IPC"
  rrect25% 85x107.99 smd: 1(-74.02,0) 2(74.01,0)
  silkscreen extent -105,-77 104,77, body extent -104,-73 104,73, height 88
SOD-323 [mm]
  rrect25% 1.26x0.58 smd: 1(-1.03,0) 2(1.03,0)
  silkscreen extent -1.26,-0.83 1,0.82, body extent -1.3,-0.67 1.3,0.68, height 1.1
SOT-23-3 [mm] "SOT23, 3-Leads, IPC"
  rrect25% 1x0.6 smd: 1(-1.2,0.95) 2(-1.2,-0.95) 3(1.2,0)
  silkscreen extent -0.3,-1.5 0.7,1.5, body extent -1.25,-1.5 1.25,1.5, height 1.1
SOT-23-5 [mm] "SOT23, 5-Leads, IPC"
  rrect25% 1.05x0.6 smd: 1(-1.375,0.95) 2(-1.375,0) 3(-1.375,-0.95) 4(1.375,-0.95) 5(1.375,0.95)
  silkscreen extent -1.5,-1.55 0.45,1.92, body extent -1.4,-1.45 1.4,1.45, height 1.45
SOT-23-6 [mm]
  rrect25% 1.24x0.63 smd: 1(-1.15,0.95) 2(-1.15,0) 3(-1.15,-0.95) 4(1.15,-0.95) 5(1.15,0) 6(1.15,0.95)
  silkscreen extent -1.3,-1.52 0.75,1.84, body extent -1.2,-1.4 1.22,1.4, height 1.09
STLD40DPUR [mm]
  rrect8% 0.74x0.32 smd mask+0.05: 1(-1.52,0.975) 2(-1.52,0.325) 3(-1.52,-0.325) 4(-1.52,-0.975) 5(1.52,-0.975) 6(1.52,-0.325) 7(1.52,0.325) 8(1.52,0.975)
  rect 0.23x0.43 smd mask+0.05: 9(-0.325,-1.56) 9(-0.325,1.56) 9(0.325,1.56) 9(0.325,-1.56)
  rect 1.8x2.74 smd paste-2 mask+0.05: 9(0,0)
  silkscreen extent -2.4,-1.66 1.66,1.66, body extent -1.5,-1.5 1.5,1.5, height 1
TEST_POINT_SMT [mm] "SMT test point, 40 mil pad"
  round 1 smd paste-2539.97: 1(0,0)
  silkscreen extent -0.74,-0.74 0.74,0.74

## Part data
C1 C2 C3 C4 C5 C6 C7 C8 C9 C10 C13 C15 C16 C17 C18 C22 C23: library part CL10B104KB8NNNL, "CAP CER 0.1UF 50V X7R 0603", Case/Package=0603, Dielectric=X7R, Manufacturer 1=Samsung, Max Operating Temperature=125°C, Min Operating Temperature=-55°C, Package Quantity=15000, Supplier Part Number 1=1276-CL10B104KB8NNNLTR-ND, Tolerance=10%, Voltage Rating=50V, Capacitance=100nF, Category="Ceramic Capacitors", ComponentLink1Description=https://datasheet.ciiva.com/26838/getdatasheetpartid-357523-26838415.pdf?src-supplier=Verical, ComponentLink1URL=https://datasheet.ciiva.com/26838/getdatasheetpartid-357523-26838415.pdf?src-supplier=Verical, ComponentLink2Description=https://datasheet.ciiva.com/25741/cl10b104kb8nnnl-25741341.pdf?src-supplier=Digi-Key, ComponentLink2URL=https://datasheet.ciiva.com/25741/cl10b104kb8nnnl-25741341.pdf?src-supplier=Digi-Key, Construction=Flat, Depth=0.8mm, Height=0.8mm, Length=1.6mm, Manufacturer Part Number 1=CL10B104KB8NNNL, Mount="Surface Mount", Packaging="Tape and Reel", Pricing 1="15000=0,00532, 30000=0,00506 (USD)", Radiation Hardening=No, RoHS=Yes, RoHS Compliant=Yes, Series=CL, Stock 1=2348404, Supplier 1=Digi-Key, Thickness=0.035inch, Voltage Rating (DC)=50V, Width=0.031inch
C11 C12 C14 C21 C24: library part CL21B106KOQNNNE, "CAP CER 10UF 16V X7R 0805", Case Code (Imperial)=0805, Case Code (Metric)=2012, Dielectric=X7R, Manufacturer 1=Samsung, Max Operating Temperature=125°C, Min Operating Temperature=-55°C, Package Quantity=1, Tolerance=10%, Voltage=16V, Capacitance=10uF, Case/Package=0805, Category="Ceramic Capacitors", ComponentLink1Description=https://datasheet.ciiva.com/25794/cl21b106koqnnne-25794472.pdf?src-supplier=Digi-Key, ComponentLink1URL=https://datasheet.ciiva.com/25794/cl21b106koqnnne-25794472.pdf?src-supplier=Digi-Key, ComponentLink2Description=https://datasheet.ciiva.com/16428/cl21b106koqnnne-16428887.pdf?src-supplier=Future+Electronics, ComponentLink2URL=https://datasheet.ciiva.com/16428/cl21b106koqnnne-16428887.pdf?src-supplier=Future+Electronics, ComponentLink3Description=https://datasheet.ciiva.com/26920/getdatasheetpartid-355170-26920201.pdf?src-supplier=Verical, ComponentLink3URL=https://datasheet.ciiva.com/26920/getdatasheetpartid-355170-26920201.pdf?src-supplier=Verical, Construction=Flat, Contact Plating=Tin, Depth=1.25mm, Height=1.25mm, Length=2mm, Manufacturer Part Number 1=CL21B106KOQNNNE, Mount="Surface Mount", Packaging="Tape and Reel", Pricing 1="2000=0,02892, 4000=0,02851, 8000=0,02768, 12000=0,02707, 16000=0,02603 (USD)", Radiation Hardening=No, RoHS=Yes, RoHS Compliant=Yes, Series=CL, Stock 1=1089000, Supplier 1=Avnet, Supplier Part Number 1=CL21B106KOQNNNE, Thickness=0.055inch, Voltage Rating=16V, Width=0.049inch
C19 C20: library part CC0603JRNPO9BN300, "CAP CER 30PF 50V NPO 0603", Case Code (Imperial)=0603, Case Code (Metric)=1608, Dielectric=C0G, Insulation Resistance=10GR, Manufacturer=Yageo, Max Operating Temperature=125°C, Min Operating Temperature=-55°C, Resistor Type=Ceramic, Tolerance=5%, Voltage Rating=50V, Capacitance=30pF, Case/Package=0603, Category="Ceramic Capacitors", ComponentLink1Description=https://datasheet.ciiva.com/26862/getdatasheetpartid-403531-26862766.pdf?src-supplier=Verical, ComponentLink1URL=https://datasheet.ciiva.com/26862/getdatasheetpartid-403531-26862766.pdf?src-supplier=Verical, ComponentLink2Description=https://datasheet.ciiva.com/7978/1132289-7978140.pdf?src-supplier=Element14, ComponentLink2URL=https://datasheet.ciiva.com/7978/1132289-7978140.pdf?src-supplier=Element14, ComponentLink3Description=https://datasheet.ciiva.com/28450/1443161-28450494.pdf?src-supplier=Element14, ComponentLink3URL=https://datasheet.ciiva.com/28450/1443161-28450494.pdf?src-supplier=Element14, ComponentLink4Description=https://datasheet.ciiva.com/13264/upy-gp-np0-16v-to-50v-8-3714-13264406.pdf?src-supplier=Mouser, ComponentLink4URL=https://datasheet.ciiva.com/13264/upy-gp-np0-16v-to-50v-8-3714-13264406.pdf?src-supplier=Mouser, Construction=Flat, Depth=0.8mm, Dissipation Factor=0.1%, Height=0.8mm, Lead Free="Lead Free", Length=1.6mm, Manufacturer Part Number=CC0603JRNPO9BN300, Mount="Surface Mount", Number of pins=2, Packaging="Tape and Reel", Pricing 1="4000=0,01130, 8000=0,00940, 12000=0,00820, 40000=0,00780 (USD)", Radiation Hardening=No, Reach SVHC Compliant=Yes, RoHS=Yes, RoHS Compliant=Yes, Series=CC, Stock 1=24000, Supplier 1="Arrow Electronics", Supplier Part Number 1=CC0603JRNPO9BN300, Termination=SMD/SMT, Thickness=0.035inch, Voltage Rating (DC)=50V, Weight=7.1E-05oz, Width=0.8mm